# EAGLE board PIPduino (EAGLE 6.4)
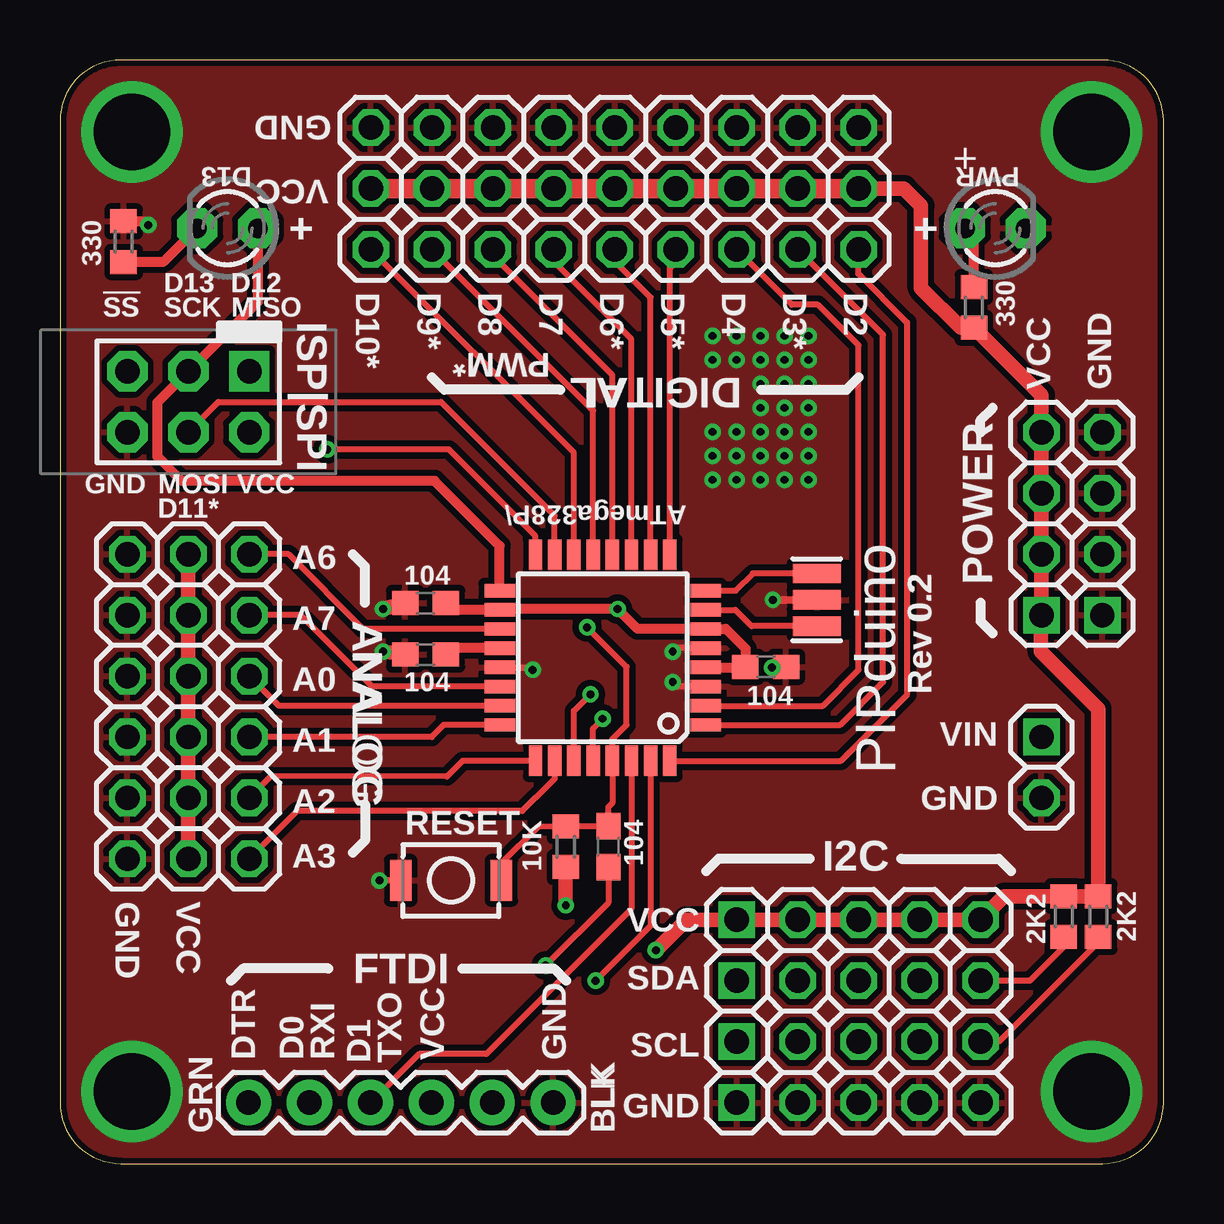
[diagram p0: board, top side]
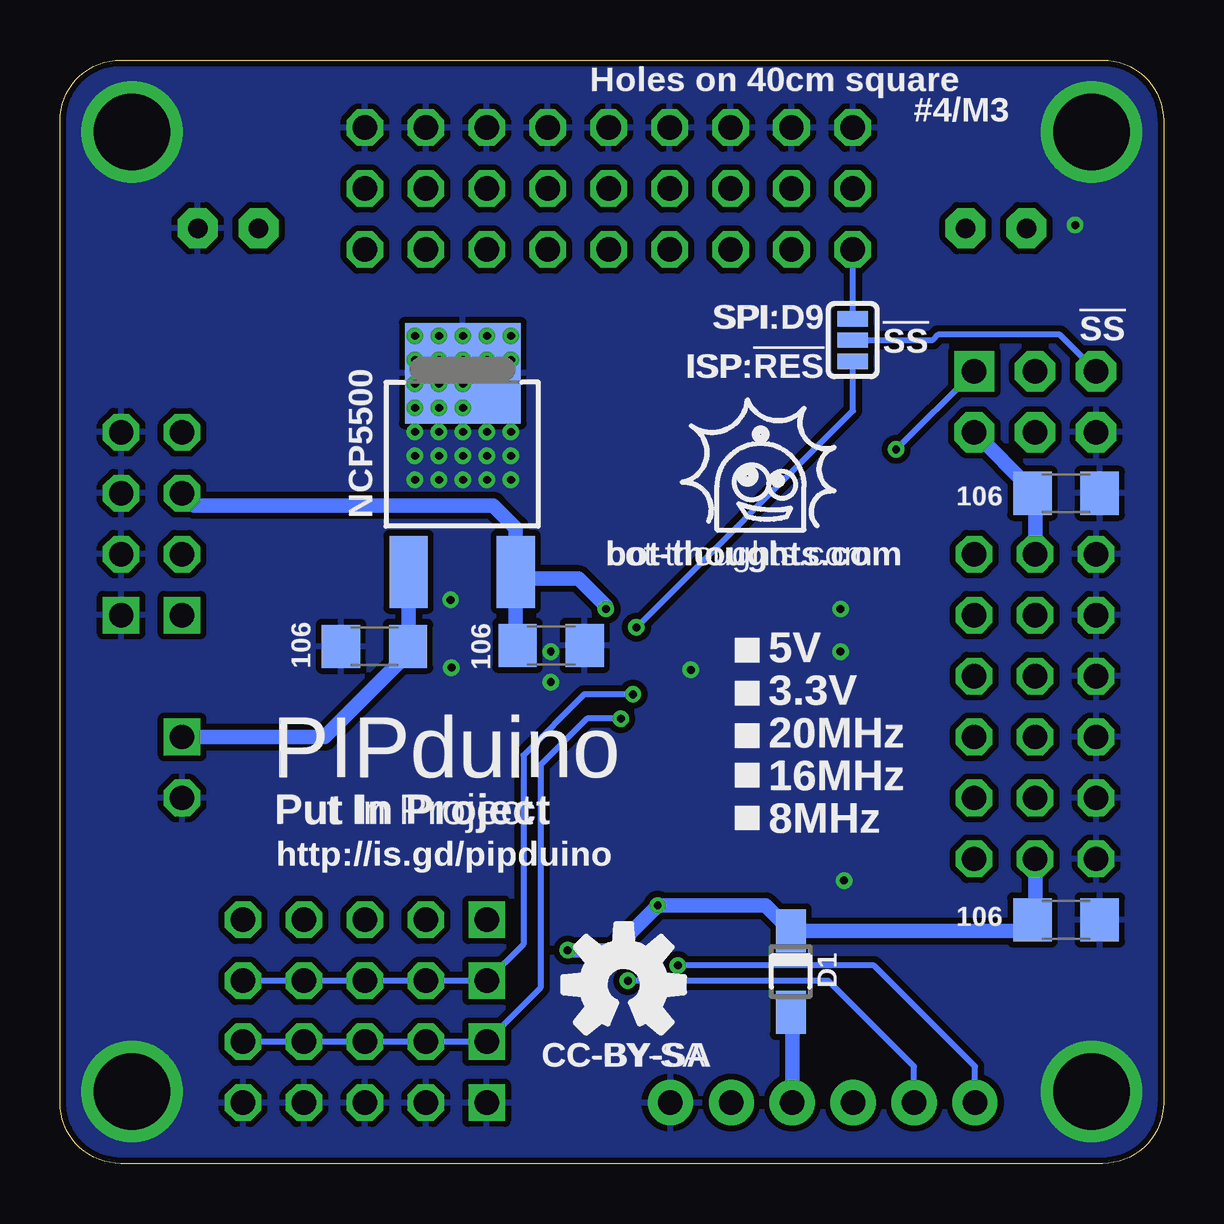
[diagram p1: board, bottom side, seen from below]

Size 46 x 46 mm. Coordinates in mm from the lower left corner, seen from the top.
Outline: 0,43.46 0,2.54 arc90 2.54,0 43.46,0 arc90 46,2.54 46,43.46 arc90 43.46,46 2.54,46 arc90 0,43.46
Copper layers (1*16): Top 0.0356mm / dielectric 1.5011mm / Bottom 0.0356mm
Design rules "LaenPCBOrder *": minimum track width 6mil, minimum drill 13mil, track to track 6mil, track to pad 6mil, pad to pad 6mil, via to via 6mil, smd to smd 6mil, copper to edge 10mil, drill to drill 6mil, minimum pad ring 7mil, minimum via ring 7mil, stop-mask expansion 3mil, vias tented up to drill 20mil, thermal gap 10mil
Net classes: 1 power: width 0.254 mm

## Footprints (pad centres in the part's own frame; a part is rotated, then mirrored left to right if it is on the bottom)
C0603 = smd 1.1 x 1: 1 -0.85,0; 2 0.85,0
C1206 = smd 1.6 x 1.8: 1 -1.4,0; 2 1.4,0
SOD123FL = smd 1.8 x 1.25: A 1.7,0; C -1.7,0
LED3MM = drill 0.813 pad 1.676 octagon: A -1.27,0; K 1.27,0
TQFP32-08 = smd 1.27 x 0.559: 1 -4.293,2.8; 2 -4.293,2; 3 -4.293,1.2; 4 -4.293,0.4; 5 -4.293,-0.4; 6 -4.293,-1.2; 7 -4.293,-2; 8 -4.293,-2.8; 17 4.293,-2.8; 18 4.293,-2; 19 4.293,-1.2; 20 4.293,-0.4; 21 4.293,0.4; 22 4.293,1.2; 23 4.293,2; 24 4.293,2.8 | smd 0.559 x 1.27: 9 -2.8,-4.293; 10 -2,-4.293; 11 -1.2,-4.293; 12 -0.4,-4.293; 13 0.4,-4.293; 14 1.2,-4.293; 15 2,-4.293; 16 2.8,-4.293; 25 2.8,4.293; 26 2,4.293; 27 1.2,4.293; 28 0.4,4.293; 29 -0.4,4.293; 30 -1.2,4.293; 31 -2,4.293; 32 -2.8,4.293
CON6P2R = drill 1.016 pad 1.676 square: 1 -2.54,-1.27 | drill 1.016 pad 1.676 octagon: 2 -2.54,1.27; 3 0,-1.27; 4 0,1.27; 5 2.54,-1.27; 6 2.54,1.27
FTDI_BASIC = drill 1.016 pad 1.88: CTS 10.16,0; DTR 0,0; GND 12.7,0; RXI 2.54,0; TXO 5.08,0; VCC 7.62,0
1X03-S = drill 1.016 octagon: 1 -2.54,0; 2 0,0; 3 2.54,0
1X04-S = drill 1.016 square: 1 -3.81,0 | drill 1.016 octagon: 2 -1.27,0; 3 1.27,0; 4 3.81,0
1X02-S = drill 1.016 square: 1 -1.27,0 | drill 1.016 octagon: 2 1.27,0
1X05-S = drill 1.016 square: 1 -5.08,0 | drill 1.016 octagon: 2 -2.54,0; 3 0,0; 4 2.54,0; 5 5.08,0
R0603 = smd 1 x 1.1: 1 -0.85,0; 2 0.85,0
3X4X2TACT = smd 0.9 x 1.7: P$1 -2.1,0; P$2 2.1,0
SJ_3 = smd 0.635 x 1.27: 1 -0.889,0; 2 0,0; 3 0.889,0
DPAK = smd 1.6 x 2.997: 1 -2.261,-3.658; 3 2.21,-3.658 | smd 4.826 x 4.191: 4 0,4.623
CSTCE_V_C = smd 0.8 x 2: GND 0,0; X1 -1.1,0; X2 1.1,0

## Placement (x,y rotation side)
C1  104  [C0603]  15.24,23.37 180 top
C2  106  [C1206]  25.53,21.59 0 bottom
C3  104  [C0603]  29.42,20.71 0 top
C4  104  [C0603]  22.86,13.21 90 top
C5  106  [C1206]  32.89,21.56 180 bottom
C6  104  [C0603]  15.24,21.21 180 top
C7  106  [C1206]  4.06,27.94 0 bottom
C8  106  [C1206]  4.06,10.16 0 bottom
D1  [SOD123FL]  15.54,8 270 bottom
D13  [LED3MM]  6.99,38.99 180 top
IC1  ATmega328P\  [TQFP32-08]  22.62,21.08 180 top
J1  ISP|SPI  [CON6P2R]  5.35,31.75 180 top
JP1  FTDI  [FTDI_BASIC]  7.86,2.54 0 top
JP2  D10*  [1X03-S]  12.95,40.64 90 top
JP6  A0  [1X03-S]  5.35,20.32 180 top
JP7  A1  [1X03-S]  5.35,17.78 180 top
JP8  A2  [1X03-S]  5.35,15.24 180 top
JP9  A3  [1X03-S]  5.35,12.7 180 top
JP10  A6  [1X03-S]  5.35,25.4 180 top
JP11  A7  [1X03-S]  5.35,22.86 180 top
JP12  D2  [1X03-S]  33.29,40.64 90 top
JP13  D3*  [1X03-S]  30.75,40.64 90 top
JP14  D4  [1X03-S]  28.21,40.64 90 top
JP15  D5*  [1X03-S]  25.67,40.64 90 top
JP16  D6*  [1X03-S]  23.13,40.64 90 top
JP17  D7  [1X03-S]  20.59,40.64 90 top
JP18  D8  [1X03-S]  18.05,40.64 90 top
JP19  D9*  [1X03-S]  15.51,40.64 90 top
JP20  GND  [1X04-S]  43.45,26.67 90 top
JP21  VCC  [1X04-S]  40.91,26.67 90 top
JP22  VIN  [1X02-S]  40.91,16.51 270 top
JP23  SCL  [1X05-S]  33.29,5.08 0 top
JP24  GND  [1X05-S]  33.29,2.54 0 top
JP25  VCC  [1X05-S]  33.29,10.16 0 top
JP26  SDA  [1X05-S]  33.29,7.62 0 top
PWR  [LED3MM]  38.99,38.99 0 top
R1  2K2  [R0603]  41.84,10.29 90 top
R2  2K2  [R0603]  43.27,10.29 90 top
R3  330  [R0603]  2.65,38.43 270 top
R4  10K  [R0603]  21.08,13.21 270 top
R5  330  [R0603]  38.1,35.69 270 top
S2  RESET  [3X4X2TACT]  16.3,11.8 0 top
SJ1  [SJ_3]  12.96,34.32 90 bottom
U1  NCP5500  [DPAK]  29.21,28.32 0 bottom
X1  16MHz  [CSTCE_V_C]  31.55,23.5 90 top

## Library data of the parts
C1-C8 R1-R5 = rcl
D1 = bt_diode
D13 PWR = bt_opto
IC1 = Arduino-AVR
J1 = bt_avr
JP1 = SparkFun
JP2 JP6-JP26 = pinhead-2
S2 = bt_electromech
SJ1 = SparkFun-Passives
U1 = bt_regulator
X1 = bt_crystal

## Nets
!RESET: C4.2 IC1.29 R4.1 S2.P$2 SJ1.1
A0: IC1.23 JP6.1
A1: IC1.24 JP7.1
A2: IC1.25 JP8.1
A3: IC1.26 JP9.1
A6: IC1.19 JP10.1
A7: IC1.22 JP11.1
D2: IC1.32 JP12.1
D3: IC1.1 JP13.1
D4: IC1.2 JP14.1
D5: IC1.9 JP15.1
D6: IC1.10 JP16.1
D7: IC1.11 JP17.1
D8: IC1.12 JP18.1
D9: IC1.13 JP19.1
D10: IC1.14 JP2.1 SJ1.3
GND: C1.2 C2.2 C3.2 C5.2 C6.2 C7.2 C8.2 IC1.3 IC1.5 IC1.21 J1.6 JP1.GND JP2.3 JP6.3 JP7.3 JP8.3 JP9.3 JP10.3 JP11.3 JP12.3 JP13.3 JP14.3 JP15.3 JP16.3 JP17.3 JP18.3 JP19.3 JP20.1 JP20.2 JP20.3 JP20.4 JP22.2 JP24.1 JP24.2 JP24.3 JP24.4 JP24.5 PWR.K R3.1 S2.P$1 U1.4 X1.GND
MISO: IC1.16 J1.1
MOSI: IC1.15 J1.4
N$1: D13.K R3.2
N$2: C5.1 JP22.1 U1.1
N$3: J1.5 SJ1.2
N$4: PWR.A R5.1
N$5: D1.A JP1.VCC
N$6: C6.1 IC1.20
N$8: IC1.7 X1.X1
N$13: IC1.8 X1.X2
N$15: C4.1 JP1.DTR
RXI: IC1.31 JP1.RXI
SCK: D13.A IC1.17 J1.3
SCL: IC1.28 JP23.1 JP23.2 JP23.3 JP23.4 JP23.5 R2.1
SDA: IC1.27 JP26.1 JP26.2 JP26.3 JP26.4 JP26.5 R1.1
TXO: IC1.30 JP1.TXO
VCC: C1.1 C2.1 C3.1 C7.1 C8.1 D1.C IC1.4 IC1.6 IC1.18 J1.2 JP2.2 JP6.2 JP7.2 JP8.2 JP9.2 JP10.2 JP11.2 JP12.2 JP13.2 JP14.2 JP15.2 JP16.2 JP17.2 JP18.2 JP19.2 JP21.1 JP21.2 JP21.3 JP21.4 JP25.1 JP25.2 JP25.3 JP25.4 JP25.5 R1.2 R2.2 R4.2 R5.2 U1.3

## Tracks (layer width: path | path; a pad name or v marks a point on that pad's centre or on a via)
!RESET  (via drill 0.33)
  Top 0.254: v21.97,22.35 23.62,20.7 23.62,18.29 23.02,17.69 IC1.29 23.02,15.02 22.86,14.86 C4.2 R4.1 19.92,14.03 18.41,12.53 18.41,11.81 S2.P$2
  Bottom 0.254: v21.97,22.35 12.94,31.38 12.94,33.42 SJ1.1
A0
  Top 0.254: IC1.23 9.13,19.08 JP6.1
A1
  Top 0.254: IC1.24 16,18.28 15.49,17.78 15.5,17.77 JP7.1
A2
  Top 0.254: IC1.25 16.79,16.79 16.13,16.13 8.8,16.15 JP8.1
A3
  Top 0.254: IC1.26 20.62,16.03 19.83,15.24 19.81,15.24 19.26,14.69 9.88,14.69 JP9.1
A6
  Top 0.254: IC1.19 12.64,22.28 9.53,25.4 JP10.1
A7
  Top 0.254: IC1.22 13.01,19.88 10.03,22.86 JP11.1
D2
  Top 0.254: IC1.32 32.55,16.79 35.32,19.56 35.32,35.07 35.29,35.07 33.27,37.08 JP12.1
D3
  Top 0.254: IC1.1 32.52,18.28 34.31,20.07 34.31,34.54 JP13.1
D4
  Top 0.254: IC1.2 31.8,19.08 33.29,20.57 33.29,34.11 31.6,35.8 30.5,35.8 28.5,37.8 JP14.1
D5
  Top 0.254: IC1.9 25.42,37.33 25.67,37.59 JP15.1
D6
  Top 0.254: IC1.10 24.62,36.1 23.13,37.59 JP16.1
D7
  Top 0.254: IC1.11 23.82,34.36 20.59,37.59 JP17.1
D8
  Top 0.254: IC1.12 23.02,32.87 18.05,37.85 JP18.1
D9
  Top 0.254: IC1.13 22.22,31.39 JP19.1
D10
  Top 0.254: IC1.14 21.42,29.63 JP2.1
  Bottom 0.254: SJ1.3 12.96,37 JP2.1
GND  (via drill 0.33, 3.2)
  Top 0.254: IC1.21 19.59,20.68 v19.7,20.57 | IC1.5 25.65,21.48 v25.54,21.34 | IC1.3 25.73,19.88 v25.54,20.07 | S2.P$1 14.22,12.19 14.11,11.8 v13.32,11.8
  Top 0.305: X1.GND v29.72,23.5
  Top 0.406: R3.1 3.52,39.28 v3.68,39.12
  Top 0.61: C3.2 30.19,20.71 v29.68,20.67 | C6.2 v13.46,21.34 | C1.2 v13.46,23.11
  other vias: 3,3 3,43 43,43 43,3 27.2,34.5 28.2,34.5 28.2,33.5 27.2,33.5 29.2,34.5 30.2,34.5 31.2,34.5 31.2,33.5 31.2,32.5 30.2,32.5 29.2,32.5 29.2,33.5 30.2,33.5 31.2,31.5 30.2,31.5 29.2,31.5 27.2,30.5 28.2,30.5 29.2,30.5 30.2,30.5 31.2,30.5 27.2,29.5 28.2,29.5 29.2,29.5 30.2,29.5 31.2,29.5 27.2,28.5 28.2,28.5 29.2,28.5 30.2,28.5 31.2,28.5
  pour Bottom (isolate 0.254, rank 3): 0,43.46 0,2.54 arc90 2.54,0 43.46,0 arc90 46,2.54 46,43.46 arc90 43.46,46 2.54,46 arc90
  pour Top (isolate 0.254, rank 3): 0.1,43.46 0.1,2.54 arc90 2.64,0 43.56,0 arc90 46.1,2.54 46.1,43.46 arc90 43.56,46 2.64,46 arc90
MISO  (via drill 0.33)
  Top 0.254: IC1.16 19.82,26.15 16.21,29.76 v11.15,29.76
  Bottom 0.254: v11.15,29.76 J1.1
MOSI
  Top 0.254: J1.4 5.35,30.5 6.6,31.75 15.88,31.75 20.62,27 IC1.15
N$1
  Top 0.406: D13.K 4.3,37.58 R3.2
N$2
  Bottom 0.61: JP22.1 34.97,17.78 31.49,21.26 C5.1 31.47,21.58 U1.1
N$3
  Bottom 0.254: J1.5 arc-45 2.82,33.05 4.32,34.54 9.4,34.54 9.62,34.32 SJ1.2
N$4
  Top 0.406: R5.1 38.1,38.61 PWR.A
N$5
  Bottom 0.61: D1.A 15.48,6.3 JP1.VCC
N$6
  Top 0.406: 16.15,21.48 16,21.34 C6.1 16.24,21.48 IC1.20
N$8
  Top 0.254: IC1.7 28.15,23.08 28.83,22.4 X1.X1
N$13
  Top 0.254: IC1.8 28.16,23.88 28.88,24.6 X1.X2
N$15  (via drill 0.33)
  Top 0.254: v20.25,8.26 22.86,10.87 C4.1 22.61,12.39
  Bottom 0.254: JP1.DTR 7.86,4.05 12.06,8.26 v20.25,8.26
RXI  (via drill 0.33)
  Top 0.254: IC1.31 24.62,9.91 v22.33,7.62
  Bottom 0.254: JP1.RXI 10.4,4.05 13.97,7.62 v22.33,7.62
SCK
  Top 0.406: IC1.17 18.33,25.74 15.62,28.45 5.08,28.45 4.06,29.46 4.06,31.73 J1.3 8.26,35.92 D13.A
SCL  (via drill 0.33)
  Top 0.254: IC1.28 22.22,18.14 v22.62,18.54 | R2.1 43.27,9.22 39.13,5.08 JP23.5
  Bottom 0.254: v22.62,18.54 24.04,18.54 25.97,16.61 25.97,7.32 JP23.1 JP23.2 JP23.3 JP23.4 JP23.5
SDA  (via drill 0.33)
  Top 0.254: IC1.27 21.42,18.87 v22.11,19.56 | R1.1 41.84,9.02 40.44,7.62 JP26.5
  Bottom 0.254: v22.11,19.56 24.15,19.56 26.69,17.02 26.69,9.14 JP26.1 JP26.2 JP26.3 JP26.4 JP26.5
TXO
  Top 0.254: IC1.30 23.82,10.61 17.78,4.57 14.97,4.57 JP1.TXO
VCC  (via drill 0.33)
  Top 0.406: 18.19,23.08 16.12,23.08 C1.1 | IC1.4 28.54,20.68 C3.1 28.57,21.46 27.76,22.28 IC1.6 24.07,22.28 v23.24,23.11 18.67,23.11 18.19,23.08 | 18.19,23.08 IC1.18
  Top 0.61: JP10.2 JP11.2 JP6.2 JP7.2 JP8.2 JP9.2 | v24.84,8.89 26.11,10.16 JP25.1 JP25.2 JP25.3 JP25.4 JP25.5 39.35,11.14 R1.2 R2.2 43.27,18.96 40.89,21.34 40.89,22.84 JP21.1 JP21.2 JP21.3 JP21.4 40.91,32.03 R5.2 37.55,34.84 35.9,36.49 35.9,39.92 35.18,40.64 33.27,40.64 | R4.2 v21.08,10.76
  Top 0.813: JP2.2 JP19.2 JP18.2 JP17.2 JP16.2 JP15.2 JP14.2 JP13.2 33.27,40.64 JP12.2
  Bottom 0.406: 5.35,27.83 C7.1 | 5.35,10.27 C8.1
  Bottom 0.61: 5.35,10.27 JP9.2 | 5.35,27.83 JP10.2 | v24.84,8.89 22.95,8.89 v21.08,10.76 16.6,10.76 D1.C 5.92,9.7 C8.1 | JP12.2 33.66,40.64 | U1.3 27,21.66 C2.1 | v23.24,23.11 23.24,23.24 24.38,24.38 26.72,24.38 U1.3 | U1.3 27,26.49 27.94,27.43 40.4,27.43 JP21.3 | C7.1 5.46,28.05 J1.2

## Text on the board
tNames: GND | VCC | D13 | D12 | !SS | SCK | MISO | PWM* | DIGITAL | GND | MOSI | VCC | D11* | POWER | ANALOG | Rev 0.2 | PIPduino | GND | I2C | GND | VCC | DTR | D0 | RXI | D1 | TXO | VCC | GND | GRN | BLK
bNames: SPI:D9 | !SS | !SS | ISP:!RES | bot-thoughts.com | 5V | 3.3V | 20MHz | 16MHz | PIPduino | 8MHz | Put In Project | http://is.gd/pipduino | CC-BY-SA
bValues: Holes on 40cm square | #4/M3
tsilk: GND | D13 | PWR | VCC | + | + | 330 | 330 | D13 | D12 | D10* | D9* | D8 | D7 | D6* | D5* | D4 | D3* | D2 | !SS | SCK | MISO | ISP|SPI | PWM* | DIGITAL | VCC | GND | GND | MOSI | VCC | D11* | ATmega328P\ | A6 | 104 | POWER | ANALOG | A7 | A0 | 104 | 104 | Rev 0.2 | VIN | A1 | PIPduino | GND | A2 | RESET | 104 | A3 | 10K | I2C | GND | VCC | VCC | 2K2 | 2K2 | SDA | FTDI | SCL | DTR | D0 | RXI | D1 | TXO | VCC | GND | GND | GRN | BLK
bsilk: Holes on 40cm square | #4/M3 | SPI:D9 | !SS | !SS | ISP:!RES | NCP5500 | 106 | bot-thoughts.com | 5V | 106 | 106 | 3.3V | 20MHz | 16MHz | PIPduino | 8MHz | Put In Project | http://is.gd/pipduino | 106 | D1 | CC-BY-SA